# Altium PCB Flyback Converter PCB.PcbDoc (part 1 of 2)
Units mm, origin at the board's own origin, x right, y up, seen from the top; angles counter-clockwise.
Board outline 115 x 45 mm, 2 copper layers (Top Layer, Bottom Layer); 51 components, 31 nets, 145 pads, 23 vias.
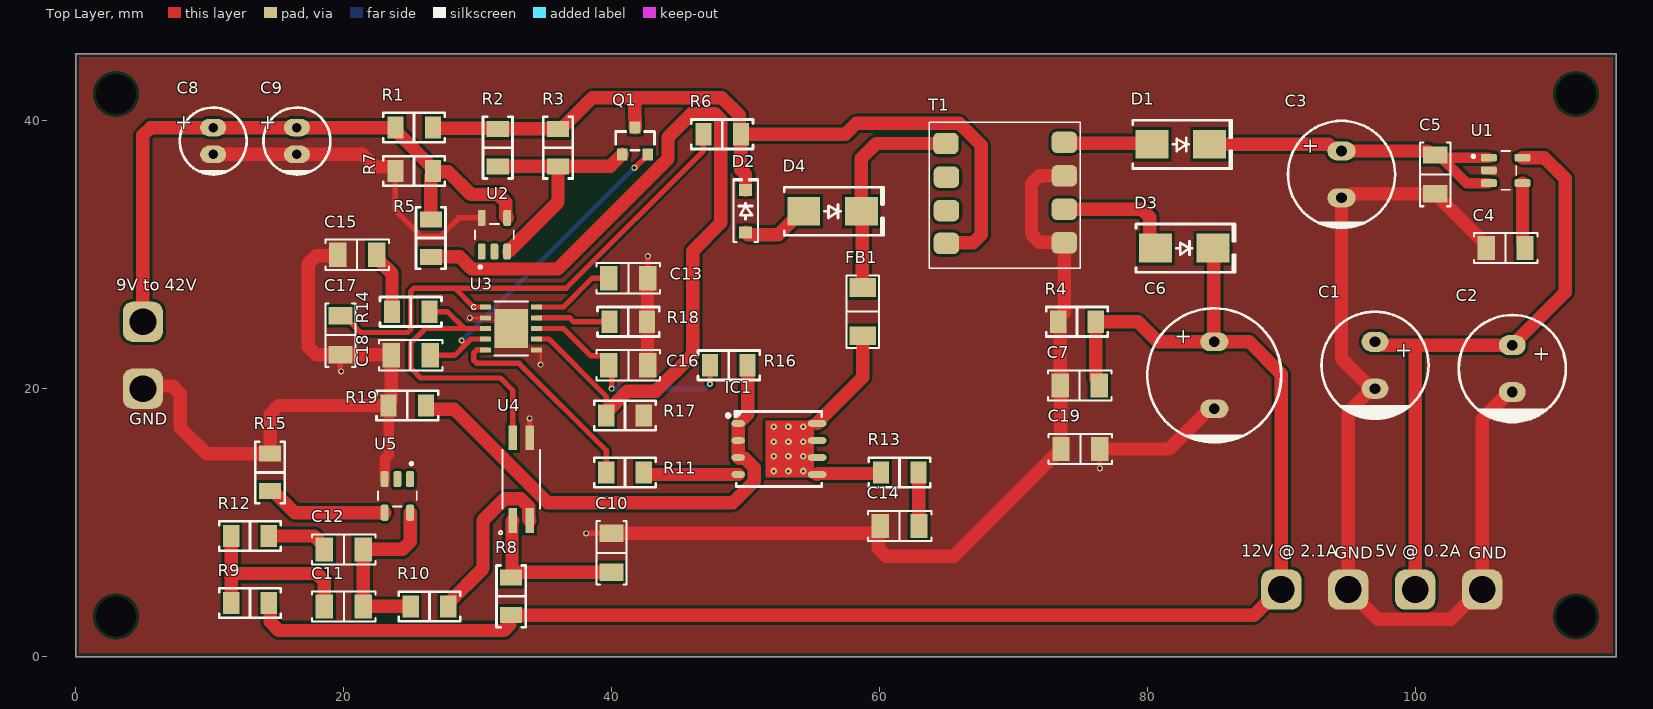
[diagram p0: Top Layer view]
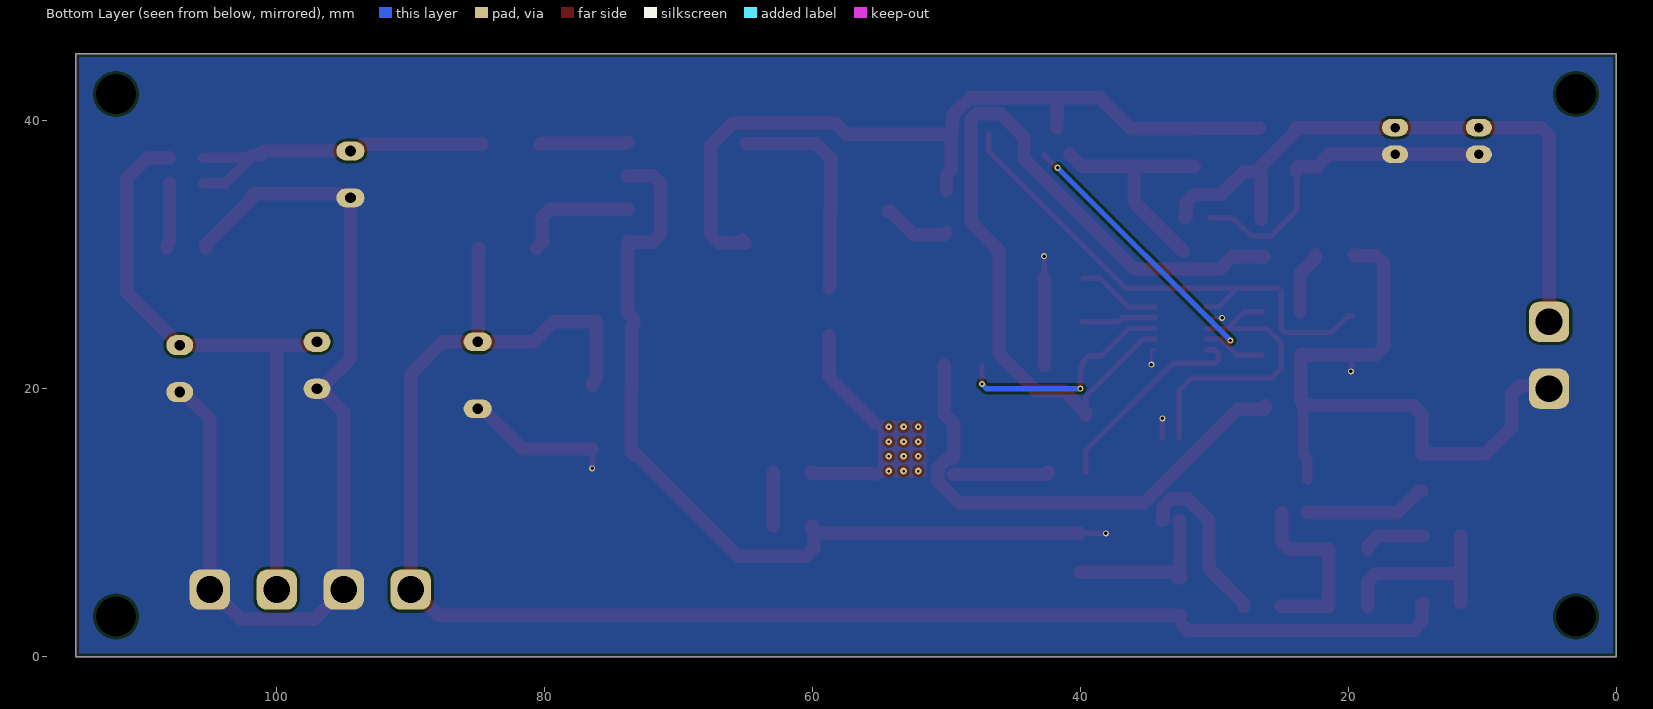
[diagram p1: Bottom Layer view, seen from below]
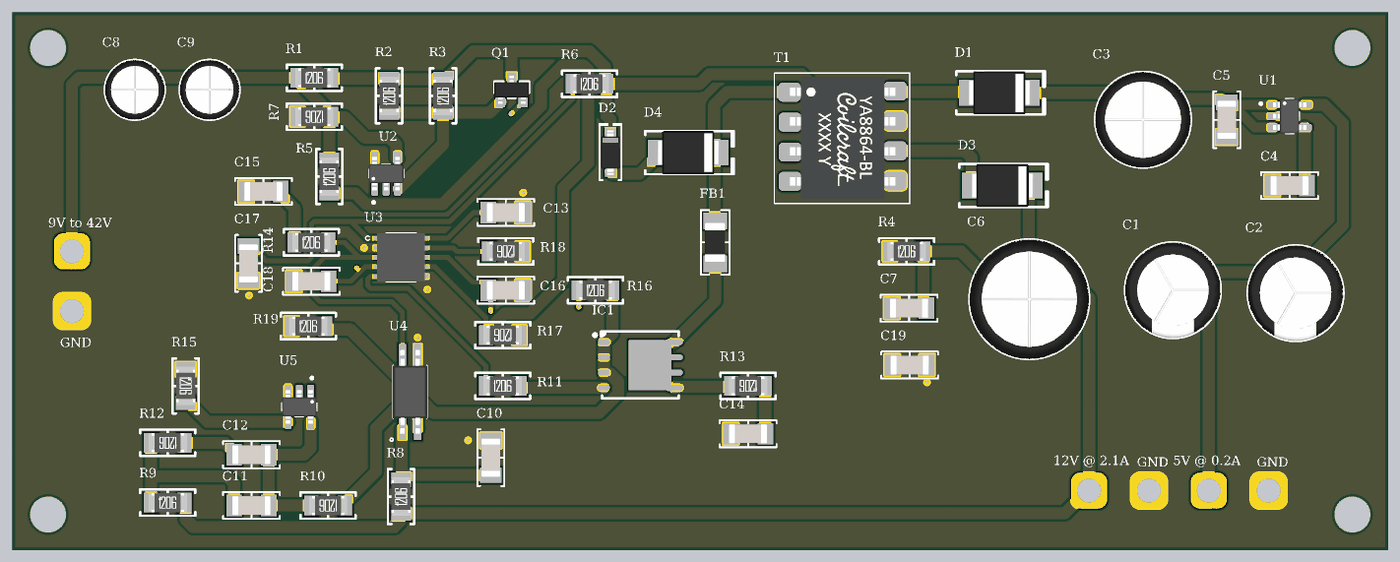
[diagram p2: 3D render of the assembled board from above, using the file's embedded part models]

## Layer stack, top to bottom
Top Solder: solder mask 0.0102, Solder Resist, Dk 3.5
Top Layer: signal copper 0.0356
Dielectric 1: dielectric 0.32, FR-4, Dk 4.8
Bottom Layer: signal copper 0.0356
Bottom Solder: solder mask 0.0102, Solder Resist, Dk 3.5

## Board outline
0,0 115,0 115,45 0,45

## Design rules (kind name [scope] priority, off if disabled: settings)
Clearance [All] p1: gap=0.2 ignorepadtopadclearanceinfootprint=FALSE
PolygonConnect [All] p1: connectstyle=Direct reliefconductorwidth=0.254 reliefentries=4 polygonreliefangle="90 Angle" airgapwidth=0.254
RoutingVias [All] p1: holewidth=0.25 width=0.45 viastyle="Through Hole" minholewidth=0.2 minwidth=0.45 maxholewidth=1 maxwidth=1
SolderMaskExpansion [All] p1: expansion=0.102 istentingtop=FALSE
Width [All] p1: maxlimit=1 minlimit=0.2 preferedwidth=0.4
30 further rules are at their usual default settings.

## Components (designator, comment, footprint, x,y, rotation, side; value= is the part's Value field where it differs from the comment)
C1 "22 µF" "CAP AL TH D8 L3.5 H12.5" 97,21.75 r270 top
C2 "10 µF" "CAP AL TH D8 L3.5 H12.5" 107.25,21.5 r270 top
C3 "150µF" "CAP TH ALUM ELEC D8.00mm S3.50mm H13.00mm" 94.5,36 r90 top
C4 "10000 pF" "CAP 1206_3216 - 0.8MM" 106.75,30.5 r0 top
C5 "1 µF" "CAP 1206_3216 - 0.8MM" 101.5,36 r90 top
C6 "680µF" "CAP TH ALUM ELEC D10.00mm S5.00mm H14.00mm" 85,21 r90 top
C7 "1 µF" "CAP 1206_3216 - 0.8MM" 74.95,20.25 r0 top
C8 "1µF" "CAP TH ALUM ELEC D5.00mm S2.00mm H12.50mm" 10.25,38.5 r90 top
C9 "1µF" "CAP TH ALUM ELEC D5.00mm S2.00mm H12.50mm" 16.5,38.5 r90 top
C10 "0.47 µF" "CAP 1206_3216 - 0.8MM" 40,7.75 r270 top
C11 "100 pF" "CAP 1206_3216 - 0.8MM" 20,3.75 r180 top
C12 "0.047 µF" "CAP 1206_3216 - 0.8MM" 20,8 r180 top
C13 "10000 pF" "CAP 1206_3216 - 0.8MM" 41.25,28.25 r180 top
C14 "100 pF" "CAP 1206_3216 - 0.8MM" 61.5,9.75 r0 top
C15 "10000 pF" "CAP 1206_3216 - 0.8MM" 21,30 r0 top
C16 "100 pF" "CAP 1206_3216 - 0.8MM" 41.25,21.75 r180 top
C17 "0.1 µF" "CAP 1206_3216 - 0.8MM" 19.75,24 r90 top
C18 "2.2 µF" "CAP 1206_3216 - 0.8MM" 25,22.5 r0 top
C19 "1000 pF" "CAP 1206_3216 - 0.8MM" 75,15.5 r0 top
D1 "MURS110T3G" "DO214AA SMB" 82.5,38.25 r0 top
D2 "MMSD4148T1G" SOD-123 50,33.25 r90 top
D3 "MURS220T3G" "DO214AA SMB" 82.75,30.5 r0 top
D4 "CZRB5365B-HF" "DO214AA SMB" 56.5,33.25 r0 top
FB1 "100 Ohms @ 100 MHz" "FER 1206_3216" 58.75,25.75 r90 top
IC1 "BSC440N10NS3GATMA1" "INFINEON PG-TDSON-8 6.15X5.32MM" 52.5,15.5 r0 top
Q1 "MMBT3904-TP" "MCCSEMI SOT-23-3" 41.75,38.5 r90 top
R1 "78.7 kOhms" "RES 1206_3216" 25.25,39.5 r0 top
R2 "10 kOhms" "RES 1206_3216" 31.5,38 r90 top
R3 "10 kOhms" "RES 1206_3216" 36,38 r90 top
R4 "806 Ohms" "RES 1206_3216" 74.75,25 r0 top
R5 "10.7 kOhms" "RES 1206_3216" 26.5,31.25 r90 top
R6 "10 Ohms" "RES 1206_3216" 48.25,39 r0 top
R7 "10 kOhms" "RES 1206_3216" 25.25,36.25 r180 top
R8 "100 Ohms" "RES 1206_3216" 32.5,4.5 r90 top
R9 "86.6 kOhms" "RES 1206_3216" 13,4 r0 top
R10 "499 Ohms" "RES 1206_3216" 26.4,3.75 r180 top
R11 "0 Ohms" "RES 1206_3216" 41,13.75 r0 top
R12 "499 Ohms" "RES 1206_3216" 13,9 r180 top
R13 "10 Ohms" "RES 1206_3216" 61.5,13.75 r180 top
R14 "1 kOhms" "RES 1206_3216" 25,25.75 r0 top
R15 "10 kOhms" "RES 1206_3216" 14.5,13.75 r270 top
R16 "2 kOhms" "RES 1206_3216" 48.75,21.75 r0 top
R17 "2.49 kOhms" "RES 1206_3216" 41,18 r180 top
R18 "21 kOhms" "RES 1206_3216" 41.25,25 r180 top
R19 "50 mOhms" "RES 1206_3216" 24.75,18.75 r0 top
T1 "ST-3-56" "flyback tranformer" 69.4,34.5 r0 top
U1 "LP2992AIM5-3.3" SOT95P280X145-5N 106.755,36.3 r0 top
U2 "LMV431ACM5" SOT95P280X145-5N 31.25,31.5 r90 top
U3 "LM5020SDX-2/NOPB" DFN400X400X80-11N 32.5,24.5 r0 top
U4 "VOS618A-7T" SOIC127P700X210-4N 33.25,13.25 r90 top
U5 "LMV431ACM5" SOT95P280X145-5N 24,12 r270 top

## Footprints (in the part's own frame and the unit in brackets; to place one, negate y for a bottom-side part, rotate by r counter-clockwise, add the part's x,y. Pads: shape width x height; smd on the part's side, far side on the other; paste and mask are expansions set on the pad)
"CAP 1206_3216 - 0.8MM" [mm] "Chip Capacitor, 2-Leads, Body 3.25x1.60mm, IPC Medium Density"
  rect 1.3x1.8 smd: 1(-1.45,0) 2(1.45,0)
  silkscreen extent -2.37,-1.12 2.37,1.12, body extent -1.6,-0.8 1.6,0.8, height 0.8
"CAP AL TH D8 L3.5 H12.5" [mm] "8MM Diameter, 3.5MM Lead Spacing Aluminium Capacitor"
  oval 1.5x2 hole 0.8: 1(-1.75,0) 2(1.75,0)
  silkscreen extent -4,-4 4,4, body extent -4,-4 4,4, height 11.5
"CAP TH ALUM ELEC D5.00mm S2.00mm H12.50mm" [mm] "5mm Diameter 2mm Lead Spacing Aluminum Electrolytic Capacitors Radial, Can"
  oval 1.3x1.95 hole 0.7: 1(1,0) 2(-1,0)
  silkscreen extent -2.5,-2.5 2.5,2.5, body extent -2.51,-2.5 2.5,2.5, height 12.5
"CAP TH ALUM ELEC D8.00mm S3.50mm H13.00mm" [mm] "8mm Diameter 3.5mm Lead Spacing Aluminum Electrolytic Capacitors Radial, Can"
  oval 1.4x2.1 hole 0.8: 1(1.75,0) 2(-1.75,0)
  silkscreen extent -4,-4 4,4, body extent -4.01,-4 4,4, height 13
"CAP TH ALUM ELEC D10.00mm S5.00mm H14.00mm" [mm] "10mm Diameter 5mm Lead Spacing Aluminum Electrolytic Capacitors Radial, Can"
  oval 1.4x2.1 hole 0.8: 1(2.5,0) 2(-2.5,0)
  silkscreen extent -5,-5 5,5, body extent -5.01,-5 5,5, height 14
DFN400X400X80-11N [mil]
  rect 32x14 smd: 1(-75,63) 2(-75,31) 3(-75,0) 4(-75,-31) 5(-75,-63) 6(75,-63) 7(75,-31) 8(75,0) 9(75,31) 10(75,63)
  rect 98x114 smd: 11(0,0)
  silkscreen extent -117,-79 49,79, body extent -79,-79 79,79, height 31
"DO214AA SMB" [mm] "Molded Diode, 2-Leads, Body 4.31x3.62mm, IPC Medium Density"
  rect 2.45x2.15 smd: 1(-2.15,0) 2(2.15,0)
  silkscreen extent -3.6,-1.8 3.8,1.8, body extent -2.6,-1.8 2.6,1.8, height 2.4
"FER 1206_3216" [mm] "Chip Ferrite, 2-Leads, Body 3.20x1.60mm, IPC Medium Density"
  rect 1.4x2 smd: 1(-1.8,0) 2(1.8,0)
  silkscreen extent -2.7,-1.2 2.7,1.2, body extent -1.65,-0.85 1.65,0.85, height 1.3
"flyback tranformer" [mm]
  rrect50% 1.9x1.6 smd: 1(-4.445,3.81) 2(-4.4,1.3) 3(-4.4,-1.2) 4(-4.4,-3.65) 5(4.4,3.9) 6(4.4,1.4) 7(4.4,-1.1) 8(4.4,-3.6)
  silkscreen extent -5.7,-5.5 5.6,5.4, body extent -4.4,-5.1 4.4,5.1, height 10.63
"INFINEON PG-TDSON-8 6.15X5.32MM" [mm] "TDSON, 8-Leads, Body 6.15x5.32mm, Pitch 1.27mm, Thermal Pad 3.60x4.05mm, IPC Medium Density"
  oval 1x0.5 smd: 1(-3.05,1.905) 2(-3.05,0.635) 3(-3.05,-0.635) 4(-3.05,-1.905)
  oval 1.4x0.5 smd: 5(2.85,-1.905) 6(2.85,-0.635) 7(2.85,0.635) 8(2.85,1.905)
  Top Layer region: -1,2.1 -1,-2.1 2.059,-2.1 2.189,-2.126 2.3,-2.2 2.3,-2.2 2.6,-2.2 2.6,2.2 2.3,2.2 2.189,2.126 2.059,2.1 2.059,2.1
  silkscreen extent -3.92,-2.8 3.2,2.8, body extent -3.17,-2.74 3.17,2.75, height 1.1
"MCCSEMI SOT-23-3" [mm] "SOT23, 3-Leads, Body 2.92x2.37mm, Pitch 0.95mm, IPC Medium Density"
  rect 0.9x0.8 smd: 1(-1,0.95) 2(-1,-0.95) 3(1,0)
  silkscreen extent -0.7,-1.45 0.7,1.45, body extent -1.16,-1.45 1.16,1.45, height 1.5
"RES 1206_3216" [mm] "Chip Resistor, 2-Leads, Body 3.13x1.55mm, IPC Medium Density"
  rect 1.2x1.65 smd: 1(-1.4,0) 2(1.4,0)
  silkscreen extent -2.3,-1.1 2.3,1.1, body extent -1.6,-0.8 1.6,0.8, height 0.6
SOD-123 [mm] "SOD, 2-Leads, Body 1.55x3.70mm, IPC Medium Density"
  rect 0.9x0.95 smd: 1(-1.575,0) 2(1.575,0)
  silkscreen extent -2.3,-0.92 2.41,0.92, body extent -1.86,-0.78 1.86,0.77, height 1.35
SOIC127P700X210-4N [mm]
  rect 1.84x0.64 smd: 1(-3.085,0.635) 2(-3.085,-0.635) 3(3.085,-0.635) 4(3.085,0.635)
  silkscreen extent -4.13,-1.4 2.2,1.66, body extent -3.5,-1.43 3.5,1.43, height 2.1
SOT95P280X145-5N [mm]
  rrect50% 1.21x0.59 smd: 1(-1.255,0.95) 2(-1.255,0) 3(-1.255,-0.95) 4(1.255,-0.95) 5(1.255,0.95)
  silkscreen extent -2.51,-1.45 0.8,1.45, body extent -1.4,-1.45 1.4,1.45, height 1.45

## Part data
C1: library part UPJ2A220MPD, "CAP ALUM 22UF 20% 100V RADIAL", Device Package="Radial, Can", Lifetime @ Temp.="3000 Hrs @ 105°C", manufacturer=Nichicon, Operating Temperature="-55°C ~ 105°C", Ripple Current @ High Frequency="230 mA @ 10 kHz", Ripple Current @ Low Frequency="122 mA @ 120 Hz", Supplier Part Number 1=493-15683-ND, Tolerance=±20%, Voltage - Rated="100 V", Applications="General Purpose", Capacitance="22 µF", componentlink1description=Datasheet, componentlink1url=http://nichicon-us.com/english/products/pdfs/e-upj.pdf, componentlink2description="DigiKey Link", componentlink2url=https://www.digikey.com/en/products/detail/nichicon/UPJ2A220MPD/2599356, Height - Seated (Max)="0.492\" (12.50mm)", lastupdated="27.08.2022 08:22:19", Lead Spacing="0.138\" (3.50mm)", Lifecycle Status=Active, Minimum Order=1, Mounting Type="Through Hole", Package / Case="Radial, Can", packaging=Bulk, Part Number=UPJ2A220MPD, Part Status=Active, partid=7301, Polarization=Polar, price=0.15, series=UPJ, Size / Dimension="0.315\" Dia (8.00mm)", Supplier 1=DigiKey, Impedance="550 mOhms"
C2: library part UKL2A100MPD1TD, "CAP ALUM 10UF 20% 100V RADIAL", Device Package="Radial, Can", Lifetime @ Temp.="2000 Hrs @ 85°C", manufacturer=Nichicon, Operating Temperature="-40°C ~ 85°C", Ripple Current @ High Frequency="180 mA @ 10 kHz", Ripple Current @ Low Frequency="90 mA @ 120 Hz", Supplier Part Number 1=493-10590-1-ND, Tolerance=±20%, Voltage - Rated="100 V", Applications="General Purpose", Capacitance="10 µF", componentlink1description=Datasheet, componentlink1url=http://nichicon-us.com/english/products/pdfs/e-ukl.pdf, componentlink2description="DigiKey Link", componentlink2url=https://www.digikey.com/en/products/detail/nichicon/UKL2A100MPD1TD/4317213, Height - Seated (Max)="0.492\" (12.50mm)", lastupdated="27.08.2022 08:22:20", Lead Spacing="0.138\" (3.50mm)", Lifecycle Status=Active, Minimum Order=1, Mounting Type="Through Hole", Package / Case="Radial, Can", packaging=TapeAndBox, Part Number=UKL2A100MPD1TD, Part Status=Active, partid=7259, Polarization=Polar, price=0.18, series=UKL, Size / Dimension="0.315\" Dia (8.00mm)", Supplier 1=DigiKey
C3: library part EKZE350ELL151MHB5D, "CAP ALUM 150UF 20% 35V RADIAL", Device Package="Radial, Can", Lifetime @ Temp.="3000 Hrs @ 105°C", manufacturer="United Chemi-Con", Operating Temperature="-40°C ~ 105°C", Ripple Current @ High Frequency="760mA @ 100kHz", Ripple Current @ Low Frequency="304mA @ 120Hz", Supplier Part Number 1=565-1689-ND, Tolerance=±20%, Voltage - Rated=35V, Applications="General Purpose", Capacitance=150µF, componentlink1description=Datasheet, componentlink1url=http://www.chemi-con.co.jp/cgi-bin/CAT_DB/SEARCH/cat_db_al.cgi?e=e&j=p&pdfname=kze, componentlink2description="DigiKey Link", componentlink2url=http://digikey.com/product-detail/en/united-chemi-con/EKZE350ELL151MHB5D/565-1689-ND/756205, Height - Seated (Max)="0.512\" (13.00mm)", lastupdated="7.09.2020 05:24:55", Lead Spacing="0.138\" (3.50mm)", Lifecycle Status=Active, Minimum Order=1, Mounting Type="Through Hole", Package / Case="Radial, Can", packaging=Bulk, Part Number=EKZE350ELL151MHB5D, Part Status=Active, partid=24171, Polarization=Polar, price=0.45, series=KZE, Size / Dimension="0.315\" Dia (8.00mm)", Supplier 1=DigiKey, Impedance="72 mOhms"
C4 C13 C15: library part C1206C103K2REC7800, "CAP CER 1206 10NF 200V X7R 10%", Device Package="1206 (3216 Metric)", manufacturer=KEMET, Operating Temperature="-55°C ~ 125°C", Supplier Part Number 1=399-C1206C103K2REC7800CT-ND, Temperature Coefficient=X7R, Tolerance=±10%, Voltage - Rated=200V, Applications="ESD Protection", Capacitance="10000 pF", componentlink1description=Datasheet, componentlink1url=https://api.kemet.com/component-edge/download/datasheet/C1206C103K2REC7800.pdf, componentlink2description="DigiKey Link", componentlink2url=https://www.digikey.com/en/products/detail/kemet/C1206C103K2REC7800/8644233, lastupdated="27.08.2022 07:36:50", Lifecycle Status=Active, Minimum Order=1, Mounting Type="Surface Mount, MLCC", Package / Case="1206 (3216 Metric)", packaging=TapeAndReel, Part Number=C1206C103K2REC7800, Part Status=Active, partid=30339, price=0.03, series="ESD SMD Comm X7R", Size / Dimension="0.126\" L x 0.063\" W (3.20mm x 1.60mm)", Supplier 1=DigiKey, Thickness (Max)="0.035\" (0.88mm)"
C5 C7: library part C1206C105K1RACAUTO, "CAP CER 1UF 100V X7R 1206", Device Package="1206 (3216 Metric)", manufacturer=KEMET, Operating Temperature="-55°C ~ 125°C", Ratings=AEC-Q200, Supplier Part Number 1=399-13374-1-ND, Temperature Coefficient=X7R, Tolerance=±10%, Voltage - Rated=100V, Applications="Automotive, Bypass, Decoupling", Capacitance="1 µF", componentlink1description=Datasheet, componentlink1url=https://api.kemet.com/component-edge/download/datasheet/C1206C105K1RACAUTO.pdf, componentlink2description="DigiKey Link", componentlink2url=https://www.digikey.com/en/products/detail/kemet/C1206C105K1RACAUTO/6108922, lastupdated="27.08.2022 07:37:35", Lifecycle Status=Active, Minimum Order=1, Mounting Type="Surface Mount, MLCC", Package / Case="1206 (3216 Metric)", packaging=TapeAndReel, Part Number=C1206C105K1RACAUTO, Part Status=Active, partid=45414, price=0.11, series="SMD Auto X7R", Size / Dimension="0.126\" L x 0.063\" W (3.20mm x 1.60mm)", Supplier 1=DigiKey, Thickness (Max)="0.071\" (1.80mm)"
C6: library part 25PX680MEFC10X12.5, "CAP ALUM 680UF 20% 25V RADIAL", Device Package="Radial, Can", Lifetime @ Temp.="2000 Hrs @ 105°C", manufacturer=Rubycon, Operating Temperature="-55°C ~ 105°C", Ripple Current @ High Frequency="756mA @ 10kHz", Ripple Current @ Low Frequency="630mA @ 120Hz", Supplier Part Number 1=1189-1229-ND, Tolerance=±20%, Voltage - Rated=25V, Applications="General Purpose", Capacitance=680µF, componentlink1description=Datasheet, componentlink1url=http://www.rubycon.co.jp/en/catalog/e_pdfs/aluminum/e_px.pdf, componentlink2description="DigiKey Link", componentlink2url=http://digikey.com/product-detail/en/rubycon/25PX680MEFC10X12.5/1189-1229-ND/3134185, Height - Seated (Max)="0.551\" (14.00mm)", lastupdated="2.09.2020 01:31:12", Lead Spacing="0.197\" (5.00mm)", Lifecycle Status=Active, Minimum Order=1, Mounting Type="Through Hole", Package / Case="Radial, Can", packaging=Bulk, Part Number=25PX680MEFC10X12.5, Part Status=Active, partid=11252, Polarization=Polar, price=0.45, series=PX, Size / Dimension="0.394\" Dia (10.00mm)", Supplier 1=DigiKey
C8 C9: library part UVP2A010MDD, "CAP ALUM 1UF 20% 100V RADIAL", Device Package="Radial, Can", Lifetime @ Temp.="2000 Hrs @ 85°C", manufacturer=Nichicon, Operating Temperature="-40°C ~ 85°C", Ripple Current @ High Frequency="42mA @ 10kHz", Ripple Current @ Low Frequency="21mA @ 120Hz", Supplier Part Number 1=493-16140-ND, Tolerance=±20%, Voltage - Rated=100V, Applications="General Purpose", Capacitance=1µF, componentlink1description=Datasheet, componentlink1url=https://products.nichicon.co.jp/en/pdf/XJA043/e-uvp.pdf, componentlink2description="DigiKey Link", componentlink2url=http://digikey.com/product-detail/en/nichicon/UVP2A010MDD/493-16140-ND/2539602, Height - Seated (Max)="0.492\" (12.50mm)", lastupdated="4.09.2020 23:28:59", Lead Spacing="0.079\" (2.00mm)", Lifecycle Status=Active, Minimum Order=1, Mounting Type="Through Hole", Package / Case="Radial, Can", packaging=Bulk, Part Number=UVP2A010MDD, Part Status=Active, partid=21862, Polarization=Bi-Polar, price=0.34, series=UVP, Size / Dimension="0.197\" Dia (5.00mm)", Supplier 1=DigiKey
C10: library part CGA5L2X7R2A474M160AE, "CAP CER 0.47UF 100V X7R 1206", Device Package="1206 (3216 Metric)", manufacturer="TDK Corporation", Operating Temperature="-55°C ~ 125°C", Ratings=AEC-Q200, Supplier Part Number 1=445-7973-1-ND, Temperature Coefficient=X7R, Tolerance=±20%, Voltage - Rated=100V, Applications="Automotive, Boardflex Sensitive", Capacitance="0.47 µF", componentlink1description=Datasheet, componentlink1url=https://product.tdk.com/info/en/catalog/datasheets/mlcc_automotive_soft_en.pdf?ref_disty=digikey, componentlink2description="DigiKey Link", componentlink2url=https://www.digikey.com/en/products/detail/tdk-corporation/CGA5L2X7R2A474M160AE/2782496, Features="Soft Termination", lastupdated="27.08.2022 07:37:39", Lifecycle Status=Active, Minimum Order=1, Mounting Type="Surface Mount, MLCC", Package / Case="1206 (3216 Metric)", packaging=TapeAndReel, Part Number=CGA5L2X7R2A474M160AE, Part Status=Active, partid=19842, price=0.20, series=CGA, Size / Dimension="0.126\" L x 0.063\" W (3.20mm x 1.60mm)", Supplier 1=DigiKey, Thickness (Max)="0.075\" (1.90mm)"
C11: library part C1206C101F1HAC7800, "CAP CER 100PF 100V X8R 1206", Device Package="1206 (3216 Metric)", manufacturer=KEMET, Operating Temperature="-55°C ~ 150°C", Supplier Part Number 1=399-C1206C101F1HAC7800CT-ND, Temperature Coefficient=X8R, Tolerance=±1%, Voltage - Rated=100V, Applications="General Purpose", Capacitance="100 pF", componentlink1description=Datasheet, componentlink1url=https://api.kemet.com/component-edge/download/datasheet/C1206C101F1HAC7800.pdf, componentlink2description="DigiKey Link", componentlink2url=https://www.digikey.com/en/products/detail/kemet/C1206C101F1HAC7800/7949928, Features="Low ESL, High Temperature", lastupdated="27.08.2022 07:36:55", Lifecycle Status=Active, Minimum Order=1, Mounting Type="Surface Mount, MLCC", Package / Case="1206 (3216 Metric)", packaging=TapeAndReel, Part Number=C1206C101F1HAC7800, Part Status=Active, partid=30701, price=0.08, series="SMD Comm X8R HT150C", Size / Dimension="0.126\" L x 0.063\" W (3.20mm x 1.60mm)", Supplier 1=DigiKey, Thickness (Max)="0.035\" (0.88mm)"
C12: library part C1206C473KAREC7800, "CAP CER 1206 47NF 250V X7R 10%", Device Package="1206 (3216 Metric)", manufacturer=KEMET, Operating Temperature="-55°C ~ 125°C", Supplier Part Number 1=399-C1206C473KAREC7800CT-ND, Temperature Coefficient=X7R, Tolerance=±10%, Voltage - Rated=250V, Applications="ESD Protection", Capacitance="0.047 µF", componentlink1description=Datasheet, componentlink1url=https://api.kemet.com/component-edge/download/datasheet/C1206C473KAREC7800.pdf, componentlink2description="DigiKey Link", componentlink2url=https://www.digikey.com/en/products/detail/kemet/C1206C473KAREC7800/8644251, lastupdated="27.08.2022 07:36:43", Lifecycle Status=Active, Minimum Order=1, Mounting Type="Surface Mount, MLCC", Package / Case="1206 (3216 Metric)", packaging=TapeAndReel, Part Number=C1206C473KAREC7800, Part Status=Active, partid=41573, price=0.04, series="ESD SMD Comm X7R", Size / Dimension="0.126\" L x 0.063\" W (3.20mm x 1.60mm)", Supplier 1=DigiKey, Thickness (Max)="0.043\" (1.10mm)"
C14 C16: library part C1206C101K1GAC7800, "CAP CER 100PF 100V C0G/NP0 1206", Device Package="1206 (3216 Metric)", manufacturer=KEMET, Operating Temperature="-55°C ~ 125°C", Supplier Part Number 1=399-C1206C101K1GAC7800CT-ND, Temperature Coefficient="C0G, NP0", Tolerance=±10%, Voltage - Rated=100V, Applications="General Purpose", Capacitance="100 pF", componentlink1description=Datasheet, componentlink1url=https://api.kemet.com/component-edge/download/datasheet/C1206C101K1GACTU.pdf, componentlink2description="DigiKey Link", componentlink2url=https://www.digikey.com/en/products/detail/kemet/C1206C101K1GAC7800/2209794, Features="Low ESL", lastupdated="27.08.2022 07:36:53", Lifecycle Status=Active, Minimum Order=1, Mounting Type="Surface Mount, MLCC", Package / Case="1206 (3216 Metric)", packaging=TapeAndReel, Part Number=C1206C101K1GAC7800, Part Status=Active, partid=30528, price=0.08, series="SMD Comm C0G", Size / Dimension="0.126\" L x 0.063\" W (3.20mm x 1.60mm)", Supplier 1=DigiKey, Thickness (Max)="0.035\" (0.88mm)"
C17: library part C1206S104K5RACAUTO, "SMD AUTO X7R FE, CERAMIC, 0.1 UF", Device Package="1206 (3216 Metric)", manufacturer=KEMET, Operating Temperature="-55°C ~ 125°C", Ratings=AEC-Q200, Supplier Part Number 1=399-C1206S104K5RACAUTOCT-ND, Temperature Coefficient=X7R, Tolerance=±10%, Voltage - Rated=50V, Applications="Automotive, Boardflex Sensitive", Capacitance="0.1 µF", componentlink1description=Datasheet, componentlink1url=https://api.kemet.com/component-edge/download/datasheet/C1206S104K5RACAUTO.pdf, componentlink2description="DigiKey Link", componentlink2url=https://www.digikey.com/en/products/detail/kemet/C1206S104K5RACAUTO/10232834, Features="Floating Electrode", lastupdated="27.08.2022 07:37:11", Lifecycle Status=Active, Minimum Order=1, Mounting Type="Surface Mount, MLCC", Package / Case="1206 (3216 Metric)", packaging=TapeAndReel, Part Number=C1206S104K5RACAUTO, Part Status=Active, partid=20853, price=0.10, series="SMD Auto X7R FE", Size / Dimension="0.126\" L x 0.063\" W (3.20mm x 1.60mm)", Supplier 1=DigiKey, Thickness (Max)="0.035\" (0.88mm)"
C18: library part C1206J225J4RACAUTO, "SMD AUTO X7R FO, CERAMIC, 2.2 UF", Device Package="1206 (3216 Metric)", manufacturer=KEMET, Operating Temperature="-55°C ~ 125°C", Ratings=AEC-Q200, Supplier Part Number 1=399-C1206J225J4RACAUTOCT-ND, Temperature Coefficient=X7R, Tolerance=±5%, Voltage - Rated=16V, Applications="Automotive, Boardflex Sensitive", Capacitance="2.2 µF", componentlink1description=Datasheet, componentlink1url=https://content.kemet.com/datasheets/KEM_C1023_X7R_AUTO_SMD.pdf, componentlink2description="DigiKey Link", componentlink2url=https://www.digikey.com/en/products/detail/kemet/C1206J225J4RACAUTO/10232740, Features="Open Mode, Soft Termination", lastupdated="27.08.2022 07:36:51", Lifecycle Status=Active, Minimum Order=1, Mounting Type="Surface Mount, MLCC", Package / Case="1206 (3216 Metric)", packaging=TapeAndReel, Part Number=C1206J225J4RACAUTO, Part Status=Active, partid=30395, price=0.25, series="SMD Auto X7R FO", Size / Dimension="0.126\" L x 0.063\" W (3.20mm x 1.60mm)", Supplier 1=DigiKey, Thickness (Max)="0.043\" (1.10mm)"
C19: library part C1206C102G2GECAUTO, "CAP CER 1206 1NF 200V C0G 2%", Device Package="1206 (3216 Metric)", manufacturer=KEMET, Operating Temperature="-55°C ~ 125°C", Ratings=AEC-Q200, Supplier Part Number 1=399-C1206C102G2GECAUTOCT-ND, Temperature Coefficient="C0G, NP0", Tolerance=±2%, Voltage - Rated=200V, Applications="Automotive, ESD Protection", Capacitance="1000 pF", componentlink1description=Datasheet, componentlink1url=https://api.kemet.com/component-edge/download/datasheet/C1206C102G2GECAUTO.pdf, componentlink2description="DigiKey Link", componentlink2url=https://www.digikey.com/en/products/detail/kemet/C1206C102G2GECAUTO/8647606, Features="Low ESL", lastupdated="27.08.2022 07:36:53", Lifecycle Status=Active, Minimum Order=1, Mounting Type="Surface Mount, MLCC", Package / Case="1206 (3216 Metric)", packaging=TapeAndReel, Part Number=C1206C102G2GECAUTO, Part Status=Active, partid=30577, price=0.35, series="ESD SMD Auto C0G", Size / Dimension="0.126\" L x 0.063\" W (3.20mm x 1.60mm)", Supplier 1=DigiKey, Thickness (Max)="0.035\" (0.88mm)"
D1: "DIODE GEN PURP 100V 2A SMB", Current - Average Rectified (Io)=2A, Current - Reverse Leakage @ Vr="2µA @ 100V", manufacturer="ON Semiconductor", Operating Temperature - Junction="-65°C ~ 175°C", Package / Case="DO-214AA, SMB", Supplier Device Package=SMB, Supplier Part Number 1=MURS110T3GOSCT-ND, Voltage - DC Reverse (Vr) (Max)=100V, Voltage - Forward (Vf) (Max) @ If="875mV @ 1A", componentlink1description=Datasheet, componentlink1url=https://www.onsemi.com/pub/Collateral/MURS120T3-D.PDF, componentlink2description="DigiKey Link", componentlink2url=http://digikey.com/product-detail/en/on-semiconductor/MURS110T3G/MURS110T3GOSCT-ND/1139952, Diode Type=Standard, lastupdated="27.08.2022 08:14:50", Lifecycle Status=Active, Minimum Order=1, Mounting Type="Surface Mount", packaging=TapeAndReel, Part Number=MURS110T3G, Part Status=Active, partid=64, price=0.11, Reverse Recovery Time (trr)=35ns, series=-, Speed="Fast Recovery =< 500ns, > 200mA (Io)", Supplier 1=DigiKey
D2: "DIODE GEN PURP 100V 200MA SOD123", Current - Average Rectified (Io)="200mA (DC)", Current - Reverse Leakage @ Vr="5µA @ 75V", manufacturer="ON Semiconductor", Operating Temperature - Junction="-55°C ~ 150°C", Package / Case=SOD-123, Supplier Part Number 1=MMSD4148T1GOSCT-ND, Voltage - DC Reverse (Vr) (Max)=100V, Voltage - Forward (Vf) (Max) @ If="1V @ 10mA", componentlink1description=Datasheet, componentlink1url=http://www.onsemi.com/pub/Collateral/MMSD4148T1-D.PDF, componentlink2description="DigiKey Link", componentlink2url=http://digikey.com/product-detail/en/on-semiconductor/MMSD4148T1G/MMSD4148T1GOSCT-ND/1121611, Diode Type=Standard, lastupdated="27.08.2022 08:15:29", Lifecycle Status=Active, Minimum Order=1, Mounting Type="Surface Mount", packaging=TapeAndReel, Part Number=MMSD4148T1G, Part Status=Active, partid=1001, price=0.02, Reverse Recovery Time (trr)=4ns, series=-, Speed="Small Signal =< 200mA (Io), Any Speed", Supplier 1=DigiKey, Supplier Device Package=SOD-123
D3: "DIODE GEN PURP 200V 2A SMB", Current - Average Rectified (Io)=2A, Current - Reverse Leakage @ Vr="2µA @ 200V", manufacturer="ON Semiconductor", Operating Temperature - Junction="-65°C ~ 175°C", Package / Case="DO-214AA, SMB", Supplier Device Package=SMB, Supplier Part Number 1=MURS220T3GOSCT-ND, Voltage - DC Reverse (Vr) (Max)=200V, Voltage - Forward (Vf) (Max) @ If="950mV @ 2A", componentlink1description=Datasheet, componentlink1url=https://www.onsemi.com/pub/Collateral/MURS220T3-D.PDF, componentlink2description="DigiKey Link", componentlink2url=http://digikey.com/product-detail/en/on-semiconductor/MURS220T3G/MURS220T3GOSCT-ND/964578, Diode Type=Standard, lastupdated="27.08.2022 08:14:50", Lifecycle Status=Active, Minimum Order=1, Mounting Type="Surface Mount", packaging=TapeAndReel, Part Number=MURS220T3G, Part Status=Active, partid=60, price=0.10, Reverse Recovery Time (trr)=35ns, series=-, Speed="Fast Recovery =< 500ns, > 200mA (Io)", Supplier 1=DigiKey
D4: "DIODE ZENER 36V 5W DO214AA", Current - Reverse Leakage @ Vr="500 nA @ 27.4 V", manufacturer="Comchip Technology", Operating Temperature="-55°C ~ 150°C", Package / Case="DO-214AA, SMB", Power - Max="5 W", Supplier Device Package="DO-214AA (SMB)", Supplier Part Number 1=641-1815-1-ND, Tolerance=±5%, Voltage - Forward (Vf) (Max) @ If="1.2 V @ 200 mA", Voltage - Zener (Nom) (Vz)="36 V", componentlink1description=Datasheet, componentlink1url="http://www.comchiptech.com/admin/files/product/CZRB5338B-HF Thru111480. CZRB5388B-HF RevA.pdf", componentlink2description="DigiKey Link", componentlink2url=https://www.digikey.com/en/products/detail/comchip-technology/CZRB5365B-HF/6138926, lastupdated="27.08.2022 08:15:45", Lifecycle Status=Active, Minimum Order=1, Mounting Type="Surface Mount", packaging=TapeAndReel, Part Number=CZRB5365B-HF, Part Status=Active, partid=1079, price=0.21, series=-, Supplier 1=DigiKey, Impedance (Max) (Zzt)="11 Ohms"
FB1: library part MFBW1V3216-101-R, "FIXED IND 100 3000MA 1206", Current Rating (Max)=3A, DC Resistance (DCR) (Max)=70mOhm, Device Package="1206 (3216 Metric)", manufacturer="Eaton - Electronics Division", Operating Temperature="-40°C ~ 85°C", Supplier Part Number 1=283-MFBW1V3216-101-RCT-ND, componentlink1description=Datasheet, componentlink1url=https://www.eaton.com/content/dam/eaton/products/electronic-components/resources/data-sheet/eaton-mfbw1v3216-high-impedance-multilayer-ferrite-chip-bead-data-sheet.pdf, componentlink2description="DigiKey Link", componentlink2url=https://www.digikey.com/en/products/detail/eaton-electronics-division/MFBW1V3216-101-R/13161083, Height (Max)="0.043\" (1.10mm)", lastupdated="27.08.2022 08:13:37", Lifecycle Status=Active, Minimum Order=1, Mounting Type="Surface Mount", Number of Lines=1, Package / Case="1206 (3216 Metric)", packaging=TapeAndReel, Part Number=MFBW1V3216-101-R, Part Status=Active, partid=2694, price=0.03, series=MFBW1V3216, Size / Dimension="0.126\" L x 0.063\" W (3.20mm x 1.60mm)", Supplier 1=DigiKey, Impedance @ Frequency="100 Ohms @ 100 MHz"
IC1: "MOSFET N-CH 100V 5.3A/18A TDSON", Current - Continuous Drain (Id) @ 25°C="5.3A (Ta), 18A (Tc)", Drain to Source Voltage (Vdss)="100 V", Drive Voltage (Max Rds On,  Min Rds On)="6V, 10V", manufacturer="Infineon Technologies", Operating Temperature="-55°C ~ 150°C (TJ)", Power Dissipation (Max)="29W (Tc)", Supplier Device Package=PG-TDSON-8-1, Supplier Part Number 1=BSC440N10NS3GATMA1CT-ND, Input Capacitance (Ciss) (Max) @ Vds="810 pF @ 50 V", componentlink1description=Datasheet, componentlink1url=https://www.infineon.com/dgdl/BSC440N10NS3+Rev2.3.pdf?folderId=db3a304313b8b5a60113cee8763b02d7&fileId=db3a30432239cccd0122604520d47f56, componentlink2description="DigiKey Link", componentlink2url=https://www.digikey.com/en/products/detail/infineon-technologies/BSC440N10NS3GATMA1/2337852, FET Type=N-Channel, Gate Charge (Qg) (Max) @ Vgs="10.8 nC @ 10 V", lastupdated="27.08.2022 08:30:10", Lifecycle Status=Active, Minimum Order=1, Mounting Type="Surface Mount", packaging=TapeAndReel, Part Number=BSC440N10NS3GATMA1, Part Status=Active, price=0.51, Rds On (Max) @ Id, Vgs="44mOhm @ 12A, 10V", series=OptiMOS™, Supplier 1=DigiKey, Technology="MOSFET (Metal Oxide)", Vgs (Max)=±20V, Vgs(th) (Max) @ Id="3.5V @ 12µA"
Q1: "TRANS NPN 40V 0.2A SOT23", Current - Collector (Ic) (Max)="200 mA", Current - Collector Cutoff (Max)="50nA (ICBO)", DC Current Gain (hFE) (Min) @ Ic, Vce="100 @ 10mA, 1V", Frequency - Transition=300MHz, manufacturer="Micro Commercial Co", Operating Temperature="-55°C ~ 150°C (TJ)", Package / Case="TO-236-3, SC-59, SOT-23-3", Power - Max="350 mW", Supplier Device Package=SOT-23, Supplier Part Number 1=MMBT3904TPMSCT-ND, Voltage - Collector Emitter Breakdown (Max)="40 V", componentlink1description=Datasheet, componentlink1url=https://www.mccsemi.com/pdf/Products/MMBT3904(SOT-23).pdf, componentlink2description="DigiKey Link", componentlink2url=https://www.digikey.com/en/products/detail/micro-commercial-co/MMBT3904-TP/717280, lastupdated="27.08.2022 08:33:48", Lifecycle Status=Active, Minimum Order=1, Mounting Type="Surface Mount", packaging=TapeAndReel, Part Number=MMBT3904-TP, Part Status=Active, partid=260, price=0.02, series=-, Supplier 1=DigiKey, Transistor Type=NPN, Vce Saturation (Max) @ Ib, Ic="300mV @ 5mA, 50mA"
R1: library part CRCW120678K7FKEA, "RES SMD 78.7K OHM 1% 1/4W 1206", Device Package="1206 (3216 Metric)", manufacturer="Vishay Dale", Operating Temperature="-55°C ~ 155°C", Power (Watts)="0.25W, 1/4W", Ratings=AEC-Q200, Supplier Device Package=1206, Supplier Part Number 1=541-78.7KFCT-ND, Temperature Coefficient=±100ppm/°C, Tolerance=±1%, componentlink1description=Datasheet, componentlink1url=http://www.vishay.com/docs/20035/dcrcwe3.pdf, componentlink2description="DigiKey Link", componentlink2url=https://www.digikey.com/en/products/detail/vishay-dale/CRCW120678K7FKEA/1176860, Composition="Thick Film", Features="Automotive AEC-Q200", Height - Seated (Max)="0.024\" (0.60mm)", lastupdated="27.08.2022 08:00:10", Lifecycle Status=Active, Minimum Order=1, Number of Terminations=2, Package / Case="1206 (3216 Metric)", packaging=TapeAndReel, Part Number=CRCW120678K7FKEA, Part Status=Active, partid=44459, price=0.01, Resistance="78.7 kOhms", series=CRCW, Size / Dimension="0.126\" L x 0.063\" W (3.20mm x 1.60mm)", Supplier 1=DigiKey
R2 R3 R7 R15: library part CRG1206F10K, "RES SMD 10K OHM 1% 1/4W 1206", Device Package="1206 (3216 Metric)", manufacturer="TE Connectivity Passive Product", Operating Temperature="-55°C ~ 155°C", Power (Watts)="0.25W, 1/4W", Supplier Device Package=1206, Supplier Part Number 1=A106069CT-ND, Temperature Coefficient=±100ppm/°C, Tolerance=±1%, componentlink1description=Datasheet, componentlink1url=https://www.te.com/commerce/DocumentDelivery/DDEController?Action=srchrtrv&DocNm=1773204&DocType=DS&DocLang=English, componentlink2description="DigiKey Link", componentlink2url=https://www.digikey.com/en/products/detail/te-connectivity-passive-product/CRG1206F10K/2389909, Composition="Thick Film", Height - Seated (Max)="0.026\" (0.65mm)", lastupdated="27.08.2022 08:00:45", Lifecycle Status=Active, Minimum Order=1, Number of Terminations=2, Package / Case="1206 (3216 Metric)", packaging=TapeAndReel, Part Number=CRG1206F10K, Part Status=Active, partid=26989, price=0.01, Resistance="10 kOhms", series="CRG, Neohm", Size / Dimension="0.122\" L x 0.061\" W (3.10mm x 1.55mm)", Supplier 1=DigiKey
R4: library part CRCW1206806RFKEA, "RES SMD 806 OHM 1% 1/4W 1206", Device Package="1206 (3216 Metric)", manufacturer="Vishay Dale", Operating Temperature="-55°C ~ 155°C", Power (Watts)="0.25W, 1/4W", Ratings=AEC-Q200, Supplier Device Package=1206, Supplier Part Number 1=541-806FCT-ND, Temperature Coefficient=±100ppm/°C, Tolerance=±1%, componentlink1description=Datasheet, componentlink1url=http://www.vishay.com/docs/20035/dcrcwe3.pdf, componentlink2description="DigiKey Link", componentlink2url=http://digikey.com/product-detail/en/vishay-dale/CRCW1206806RFKEA/541-806FCT-ND/1181749, Composition="Thick Film", Features="Automotive AEC-Q200", Height - Seated (Max)="0.024\" (0.60mm)", lastupdated="27.08.2022 08:00:08", Lifecycle Status=Active, Minimum Order=1, Number of Terminations=2, Package / Case="1206 (3216 Metric)", packaging=TapeAndReel, Part Number=CRCW1206806RFKEA, Part Status=Active, partid=44894, price=0.01, Resistance="806 Ohms", series=CRCW, Size / Dimension="0.126\" L x 0.063\" W (3.20mm x 1.60mm)", Supplier 1=DigiKey
R5: library part RC1206FR-0710K7L, "RES 10.7K OHM 1% 1/4W 1206", Device Package="1206 (3216 Metric)", manufacturer=Yageo, Operating Temperature="-55°C ~ 155°C", Power (Watts)="0.25W, 1/4W", Supplier Device Package=1206, Supplier Part Number 1=311-10.7KFRCT-ND, Temperature Coefficient=±100ppm/°C, Tolerance=±1%, componentlink1description=Datasheet, componentlink1url=https://www.yageo.com/upload/media/product/productsearch/datasheet/rchip/PYu-RC_Group_51_RoHS_L_10.pdf, componentlink2description="DigiKey Link", componentlink2url=https://www.digikey.com/en/products/detail/yageo/RC1206FR-0710K7L/728490, Composition="Thick Film", Features="Moisture Resistant", Height - Seated (Max)="0.026\" (0.65mm)", lastupdated="27.08.2022 08:00:44", Lifecycle Status=Active, Minimum Order=1, Number of Terminations=2, Package / Case="1206 (3216 Metric)", packaging=TapeAndReel, Part Number=RC1206FR-0710K7L, Part Status=Active, partid=27099, price=0.01, Resistance="10.7 kOhms", series=RC_L, Size / Dimension="0.122\" L x 0.063\" W (3.10mm x 1.60mm)", Supplier 1=DigiKey
R6 R13: library part CRCW120610R0FKEB, "RES SMD 10 OHM 1% 1/4W 1206", Device Package="1206 (3216 Metric)", manufacturer="Vishay Dale", Operating Temperature="-55°C ~ 155°C", Power (Watts)="0.25W, 1/4W", Ratings=AEC-Q200, Supplier Device Package=1206, Supplier Part Number 1=541-CRCW120610R0FKEBCT-ND, Temperature Coefficient=±100ppm/°C, Tolerance=±1%, componentlink1description=Datasheet, componentlink1url=http://www.vishay.com/docs/20035/dcrcwe3.pdf, componentlink2description="DigiKey Link", componentlink2url=http://digikey.com/product-detail/en/vishay-dale/CRCW120610R0FKEB/541-CRCW120610R0FKEBCT-ND/11500734, Composition="Thick Film", Features="Automotive AEC-Q200", lastupdated="27.08.2022 07:59:59", Lifecycle Status=Active, Minimum Order=1, Number of Terminations=2, Package / Case="1206 (3216 Metric)", packaging=TapeAndReel, Part Number=CRCW120610R0FKEB, partid=56965, price=0.01, Resistance="10 Ohms", series=CRCW, Supplier 1=DigiKey
R8: library part CRCW1206100RFKEB, "RES SMD 100 OHM 1% 1/4W 1206", Device Package="1206 (3216 Metric)", manufacturer="Vishay Dale", Operating Temperature="-55°C ~ 155°C", Power (Watts)="0.25W, 1/4W", Ratings=AEC-Q200, Supplier Device Package=1206, Supplier Part Number 1=541-CRCW1206100RFKEBCT-ND, Temperature Coefficient=±100ppm/°C, Tolerance=±1%, componentlink1description=Datasheet, componentlink1url=http://www.vishay.com/docs/20035/dcrcwe3.pdf, componentlink2description="DigiKey Link", componentlink2url=https://www.digikey.com/en/products/detail/vishay-dale/CRCW1206100RFKEB/5076280, Composition="Thick Film", Features="Automotive AEC-Q200", Height - Seated (Max)="0.024\" (0.60mm)", lastupdated="27.08.2022 07:59:59", Lifecycle Status=Active, Minimum Order=1, Number of Terminations=2, Package / Case="1206 (3216 Metric)", packaging=TapeAndReel, Part Number=CRCW1206100RFKEB, Part Status=Active, partid=56951, price=0.01, Resistance="100 Ohms", series=CRCW, Size / Dimension="0.126\" L x 0.063\" W (3.20mm x 1.60mm)", Supplier 1=DigiKey
R9: library part CRCW120686K6FKEA, "RES SMD 86.6K OHM 1% 1/4W 1206", Device Package="1206 (3216 Metric)", manufacturer="Vishay Dale", Operating Temperature="-55°C ~ 155°C", Power (Watts)="0.25W, 1/4W", Ratings=AEC-Q200, Supplier Device Package=1206, Supplier Part Number 1=541-86.6KFCT-ND, Temperature Coefficient=±100ppm/°C, Tolerance=±1%, componentlink1description=Datasheet, componentlink1url=http://www.vishay.com/docs/20035/dcrcwe3.pdf, componentlink2description="DigiKey Link", componentlink2url=https://www.digikey.com/en/products/detail/vishay-dale/CRCW120686K6FKEA/1176865, Composition="Thick Film", Features="Automotive AEC-Q200", Height - Seated (Max)="0.024\" (0.60mm)", lastupdated="27.08.2022 08:00:43", Lifecycle Status=Active, Minimum Order=1, Number of Terminations=2, Package / Case="1206 (3216 Metric)", packaging=TapeAndReel, Part Number=CRCW120686K6FKEA, Part Status=Active, partid=27592, price=0.01, Resistance="86.6 kOhms", series=CRCW, Size / Dimension="0.126\" L x 0.063\" W (3.20mm x 1.60mm)", Supplier 1=DigiKey
R10 R12: library part CR1206-FX-4990ELF, "RES SMD 499 OHM 1% 1/4W 1206", Device Package="1206 (3216 Metric)", manufacturer="Bourns Inc.", Operating Temperature="-55°C ~ 155°C", Power (Watts)="0.25W, 1/4W", Supplier Device Package=1206, Supplier Part Number 1=CR1206-FX-4990ELFCT-ND, Temperature Coefficient=±100ppm/°C, Tolerance=±1%, componentlink1description=Datasheet, componentlink1url=https://www.bourns.com/docs/Product-Datasheets/CHPREZTR.pdf, componentlink2description="DigiKey Link", componentlink2url=https://www.digikey.com/en/products/detail/bourns-inc/CR1206-FX-4990ELF/2563086, Composition="Thick Film", Features="Moisture Resistant", Height - Seated (Max)="0.030\" (0.75mm)", lastupdated="27.08.2022 08:00:42", Lifecycle Status=Active, Minimum Order=1, Number of Terminations=2, Package / Case="1206 (3216 Metric)", packaging=TapeAndReel, Part Number=CR1206-FX-4990ELF, Part Status=Active, partid=27856, price=0.01, Resistance="499 Ohms", series=CR1206, Size / Dimension="0.126\" L x 0.063\" W (3.20mm x 1.60mm)", Supplier 1=DigiKey
R11: library part CRCW12060000ZSTA, "RES SMD 0 OHM JUMPER 1/4W 1206", Device Package="1206 (3216 Metric)", manufacturer="Vishay Dale", Operating Temperature="-55°C ~ 155°C", Power (Watts)="0.25W, 1/4W", Ratings=AEC-Q200, Supplier Device Package=1206, Supplier Part Number 1=541-4322-1-ND, Tolerance=Jumper, componentlink1description=Datasheet, componentlink1url=http://www.vishay.com/docs/20008/dcrcw.pdf, componentlink2description="DigiKey Link", componentlink2url=https://www.digikey.com/en/products/detail/vishay-dale/CRCW12060000ZSTA/5076261, Composition="Thick Film", Features="Automotive AEC-Q200", Height - Seated (Max)="0.024\" (0.60mm)", lastupdated="27.08.2022 08:00:45", Lifecycle Status=Active, Minimum Order=1, Number of Terminations=2, Package / Case="1206 (3216 Metric)", packaging=TapeAndReel, Part Number=CRCW12060000ZSTA, Part Status=Active, partid=26954, price=0.02, Resistance="0 Ohms", series=CRCW, Size / Dimension="0.126\" L x 0.063\" W (3.20mm x 1.60mm)", Supplier 1=DigiKey
R14: library part CRCW12061K00FKEBC, "RES 1K OHM 1% 1/4W 1206", Device Package="1206 (3216 Metric)", manufacturer="Vishay Dale", Operating Temperature="-55°C ~ 155°C", Power (Watts)="0.25W, 1/4W", Supplier Device Package=1206, Supplier Part Number 1=541-CRCW12061K00FKEBCCT-ND, Temperature Coefficient=±100ppm/°C, Tolerance=±1%, componentlink1description=Datasheet, componentlink1url=https://www.vishay.com/docs/28773/crcwce3.pdf, componentlink2description="DigiKey Link", componentlink2url=https://www.digikey.com/en/products/detail/vishay-dale/CRCW12061K00FKEBC/7921275, Composition="Thick Film", Height - Seated (Max)="0.026\" (0.65mm)", lastupdated="27.08.2022 07:59:49", Lifecycle Status=Active, Minimum Order=1, Number of Terminations=2, Package / Case="1206 (3216 Metric)", packaging=TapeAndReel, Part Number=CRCW12061K00FKEBC, Part Status=Active, partid=66202, price=0.01, Resistance="1 kOhms", series=CRCW-C, Size / Dimension="0.120\" L x 0.061\" W (3.05mm x 1.55mm)", Supplier 1=DigiKey
R16: library part CRCW12062K00FKEA, "RES SMD 2K OHM 1% 1/4W 1206", Device Package="1206 (3216 Metric)", manufacturer="Vishay Dale", Operating Temperature="-55°C ~ 155°C", Power (Watts)="0.25W, 1/4W", Ratings=AEC-Q200, Supplier Device Package=1206, Supplier Part Number 1=541-2.00KFCT-ND, Temperature Coefficient=±100ppm/°C, Tolerance=±1%, componentlink1description=Datasheet, componentlink1url=http://www.vishay.com/docs/20035/dcrcwe3.pdf, componentlink2description="DigiKey Link", componentlink2url=https://www.digikey.com/en/products/detail/vishay-dale/CRCW12062K00FKEA/1176676, Composition="Thick Film", Features="Automotive AEC-Q200", Height - Seated (Max)="0.024\" (0.60mm)", lastupdated="27.08.2022 08:00:37", Lifecycle Status=Active, Minimum Order=1, Number of Terminations=2, Package / Case="1206 (3216 Metric)", packaging=TapeAndReel, Part Number=CRCW12062K00FKEA, Part Status=Active, partid=31175, price=0.01, Resistance="2 kOhms", series=CRCW, Size / Dimension="0.126\" L x 0.063\" W (3.20mm x 1.60mm)", Supplier 1=DigiKey
R17: library part CRCW12062K49FKEA, "RES SMD 2.49K OHM 1% 1/4W 1206", Device Package="1206 (3216 Metric)", manufacturer="Vishay Dale", Operating Temperature="-55°C ~ 155°C", Power (Watts)="0.25W, 1/4W", Ratings=AEC-Q200, Supplier Device Package=1206, Supplier Part Number 1=541-2.49KFCT-ND, Temperature Coefficient=±100ppm/°C, Tolerance=±1%, componentlink1description=Datasheet, componentlink1url=http://www.vishay.com/docs/20035/dcrcwe3.pdf, componentlink2description="DigiKey Link", componentlink2url=https://www.digikey.com/en/products/detail/vishay-dale/CRCW12062K49FKEA/1176687, Composition="Thick Film", Features="Automotive AEC-Q200", Height - Seated (Max)="0.024\" (0.60mm)", lastupdated="27.08.2022 08:00:36", Lifecycle Status=Active, Minimum Order=1, Number of Terminations=2, Package / Case="1206 (3216 Metric)", packaging=TapeAndReel, Part Number=CRCW12062K49FKEA, Part Status=Active, partid=31570, price=0.01, Resistance="2.49 kOhms", series=CRCW, Size / Dimension="0.126\" L x 0.063\" W (3.20mm x 1.60mm)", Supplier 1=DigiKey
R18: library part CRCW120621K0FKEA, "RES SMD 21K OHM 1% 1/4W 1206", Device Package="1206 (3216 Metric)", manufacturer="Vishay Dale", Operating Temperature="-55°C ~ 155°C", Power (Watts)="0.25W, 1/4W", Ratings=AEC-Q200, Supplier Device Package=1206, Supplier Part Number 1=541-21.0KFCT-ND, Temperature Coefficient=±100ppm/°C, Tolerance=±1%, componentlink1description=Datasheet, componentlink1url=http://www.vishay.com/docs/20035/dcrcwe3.pdf, componentlink2description="DigiKey Link", componentlink2url=http://digikey.com/product-detail/en/vishay-dale/CRCW120621K0FKEA/541-21.0KFCT-ND/1181908, Composition="Thick Film", Features="Automotive AEC-Q200", Height - Seated (Max)="0.024\" (0.60mm)", lastupdated="27.08.2022 08:00:27", Lifecycle Status=Active, Minimum Order=1, Number of Terminations=2, Package / Case="1206 (3216 Metric)", packaging=TapeAndReel, Part Number=CRCW120621K0FKEA, Part Status=Active, partid=36417, price=0.01, Resistance="21 kOhms", series=CRCW, Size / Dimension="0.126\" L x 0.063\" W (3.20mm x 1.60mm)", Supplier 1=DigiKey
R19: library part RL1206FR-070R05L, "RES 0.05 OHM 1% 1/4W 1206", Device Package="1206 (3216 Metric)", manufacturer=Yageo, Operating Temperature="-55°C ~ 155°C", Power (Watts)="0.25W, 1/4W", Ratings=AEC-Q200, Supplier Device Package=1206, Supplier Part Number 1=311-.05LWCT-ND, Temperature Coefficient=±1000ppm/°C, Tolerance=±1%, componentlink1description=Datasheet, componentlink1url=http://www.yageo.com/documents/recent/PYu-RL_Group_521_RoHS_L_2.pdf, componentlink2description="DigiKey Link", componentlink2url=https://www.digikey.com/en/products/detail/yageo/RL1206FR-070R05L/3885413, Composition="Thick Film", Features="Automotive AEC-Q200, Current Sense, Moisture Resistant", Height - Seated (Max)="0.026\" (0.65mm)", lastupdated="27.08.2022 08:00:45", Lifecycle Status=Active, Minimum Order=1, Number of Terminations=2, Package / Case="1206 (3216 Metric)", packaging=TapeAndReel, Part Number=RL1206FR-070R05L, Part Status=Active, partid=26850, price=0.09, Resistance="50 mOhms", series=RL, Size / Dimension="0.122\" L x 0.063\" W (3.10mm x 1.60mm)", Supplier 1=DigiKey
T1: "Split Bobbin Low Power Transformer", Package=None, Availability=Unavailable, MP=ST-3-56, price=None
U1: Package=None, Availability=Unavailable, MP=LP2992AIM5-3.3, price=None
U2 U5: "1%, low-voltage (1.24-V) adjustable precision shunt regulator 5-SOT-23 0 to 70", Package="SOT-23-5 Texas Instruments", Availability=Warning, Check_prices=https://www.snapeda.com/parts/LMV431ACM5/Texas%20Instruments/view-part/17613/?ref=eda, MF="Texas Instruments", MP=LMV431ACM5, price=None, Purchase-URL=https://pricing.snapeda.com/search/part/LMV431ACM5/?ref=eda, SnapEDA_Link=https://www.snapeda.com/parts/LMV431ACM5/Texas%20Instruments/view-part/17613/?ref=snap
U3: "13-100V Wide Vin, Current Mode PWM Boost, Flyback, Sepic Controller", Package="WSON-10 Texas Instruments", Availability="In Stock", Check_prices=https://www.snapeda.com/parts/LM5020SDX-2/NOPB/Texas+Instruments/view-part/?ref=eda, MF="Texas Instruments", MP=LM5020SDX-2/NOPB, price=None, Purchase-URL=https://pricing.snapeda.com/search/part/LM5020SDX-2/NOPB/?ref=eda, SnapEDA_Link=https://www.snapeda.com/parts/LM5020SDX-2/NOPB/Texas+Instruments/view-part/?ref=snap
U4: "Optoisolator Transistor Output 3750Vrms 1 Channel 4-SSOP", Package="SSOP-4 Vishay", Availability=Unavailable, MF=Vishay, MP=VOS618A-7T, price=None, SnapEDA_Link=https://www.snapeda.com/parts/VOS618A-7T/Vishay%20Semiconductor%20Opto%20Division/view-part/697930/?ref=snap

## Free pads (board coordinates)
  rrect50% 3x3 hole 2: 9(5,25) 10(5,20) 11(105,5) 12(100,5) 13(95,5) 14(90,5)
  round 0 hole 3: 17(3,42) 18(3,3) 19(112,42) 20(112,3)

## Via types
v1: diameter 0.5, hole 0.2, Top Layer to Bottom Layer, tented top, 12 vias
v2: diameter 0.45, hole 0.25, Top Layer to Bottom Layer, 11 vias

## Nets (pads, with @x,y where several pads share a name; then routed paths per layer and width w, separated by ;. In a path a pad name is that pad's centre, name@x,y a point inside that pad or via, vN(x,y) a via of type N, cw(c..) or ccw(c..) an arc to the next point about the centre after c; other vN are vias at no path point)
GND: C1.2 C2.2 C3.2 C4.1 C5.1 C6.2 C7.1 C8.2 C9.2 C10.1 C13.1 C14.1 C15.1 C16.1 C17.1 C18.1 C19.1 C19.2 pad.10 pad.11 pad.13 R4.1 R7.2 R15.1 R17.1 R18.1 R19.1 T1.6 T1.8 U1.2 U2.5 U3.2 U3.6 U3.11 U4.3 U5.3 | length 237
  Top Layer w0.2: v2(29.413,25.287) U3.2 ; U3.6 34.622,22.9 34.7,22.822 v2(34.7,21.8)
  Top Layer w0.4: C17.1 19.75,21.35 v2(19.8,21.3) ; R7.2 23.85,33.309 25.759,31.4 27.241,31.4 28.596,32.755 U2.5 ; U4.3 v2(33.885,17.785) ; v2(38.1,9.2) C10.1 ; C13.1 v2(42.7,29.9) ; v2(76.45,14.05) C19.2
  Top Layer w0.8: U5.3 23.05,14.75 23.35,15.05 R19.1
  Top Layer w1: pad.10 5.2,20.2 7.214,20.2 7.8,19.614 7.8,17.1 9.75,15.15 R15.1 14.5,18.1 15.15,18.75 R19.1 23.35,18.975 23.55,19.175 C18.1 23.525,22.525 19.775,22.525 C17.1 17.936,22.55 17.35,23.136 17.35,29.35 17.936,29.936 19.486,29.936 C15.1 ; C8.2 C9.2 21.4,37.5 22.325,36.575 23.75,36.575 23.85,36.475 R7.2 ; C10.1 59.5,9.2 59.65,9.35 C14.1@59.9,9.35 ; C16.1 42.675,21.775 42.675,24.975 R18.1 42.675,25.025 42.675,28.225 C13.1 ; C14.1 60.05,9.5 C14.1@59.9,9.35 ; T1.6 71.936,35.9 71.35,35.314 71.35,31.536 71.936,30.95 73.65,30.95 73.7,31 T1.8 73.8,25.675 73.35,25.225 R4.1 73.35,24.775 73.5,24.625 C7.1 73.525,20.225 73.525,15.525 C19.1 73.55,15.25 73.4,15.1 73.15,15.1 65.55,7.5 60.486,7.5 59.9,8.086 C14.1@59.9,9.35 ; C19.2 81.65,15.5 84.65,18.5 C6.2 ; C1.2 C1.2@96.75,20 ; C4.1 105.3,30.75 101.9,34.15 101.9,34.4 101.75,34.55 C5.1 95.258,34.55 94.958,34.25 C3.2 94.5,22.25 C1.2@96.75,20 ; C2.2 107,19.75 105,17.75 pad.11 104.865,5 102.665,2.8 97.2,2.8 pad.13 95,18.25 C1.2@96.75,20
NetC1_1: C1.1 C2.1 pad.12 U1.5 | length 46.6
  Top Layer w1: C1.1 97.385,23.5 97.635,23.25 100,23.25 ; pad.12 100,23.25 ; U1.5 109.65,37.25 111.2,35.7 111.2,27.2 107.596,23.596 107.596,23.481 107.365,23.25 C2.1 100,23.25
NetC3_1: C3.1 C5.2 D1.2 U1.1 U1.3 | length 25.6
  Top Layer w0.8: C5.2@101.75,37.45 C5.2@101.95,37.25 ; U1.3 103.85,35.35 C5.2@101.95,37.25 ; U1.1 C5.2@101.95,37.25
  Top Layer w1: D1.2 93.542,38.25 94.042,37.75 C3.1 100.95,37.75 101.25,37.45 C5.2 C5.2@101.75,37.45
NetC4_2: C4.2 U1.4 | length 4.9
  Top Layer w1: U1.4 108.01,30.94 108.2,30.75 C4.2
NetC6_1: C6.1 C7.2 D3.2 pad.14 R4.2 R8.1 R9.2 | length 121.5
  Top Layer w1: R9.2 14.5,3.9 14.5,2.6 15.149,1.951 31.966,1.951 32.4,2.386 ; R8.1 87.965,3.1 89.865,5 pad.14 90,21.1 87.6,23.5 C6.1 ; C7.2 76.4,20.5 76.15,20.75 R4.2 79.3,25 80.8,23.5 C6.1 ; D3.2 84.95,30.45 84.95,23.55 C6.1
NetC8_1: C8.1 C9.1 pad.9 R1.1 R5.2 R7.1 U2.4 | length 48.7
  Top Layer w1: pad.9 5,38.914 5.586,39.5 C8.1 C9.1 R1.1 23.95,39.4 23.95,39.175 26.65,36.475 R7.1@26.65,36.3 ; R5.2 26.5,35.875 26.65,36.025 R7.1 R7.1@26.65,36.3 ; U2.4 32.1,32.855 32.1,33.914 31.514,34.5 29.5,34.5 27.8,36.2 26.75,36.2 R7.1@26.65,36.3
NetC10_2: C10.2 R8.2 U4.1 | length 12
  Top Layer w1: U4.1 32.558,10.108 32.558,5.958 R8.2 32.725,5.9 33.125,6.3 C10.2
NetC11_1: C11.1 C12.1 R10.2 U5.5 | length 13.7
  Top Layer w1: U5.5 24.95,8.586 24.364,8 C12.1 C11.1 R10.2
NetC11_2: C11.2 R9.1 R12.2 | length 14.1
  Top Layer w1: R9.1 11.6,6.2 ; R12.2 11.6,6.2 ; C11.2 18.55,5.614 17.964,6.2 11.6,6.2
NetC12_2: C12.2 R12.1 | length 4.7
  Top Layer w1: R12.1 17.8,9 18.55,8.25 C12.2
NetC13_2: C13.2 U3.10 | length 6.3
  Top Layer w0.4: U3.10 36.4,26.1 38.55,28.25 C13.2
NetC14_2: C14.2 R13.1 | length 4